# Altium PCB Current Printed PCB, Altium.pcbdoc
Units mil, origin at the board's own origin, x right, y up, seen from the top; angles counter-clockwise.
Board outline 3332.84 x 3303.97 mil, 2 copper layers (Top Layer, Bottom Layer); 17 components, 43 nets, 85 pads, 8 vias.
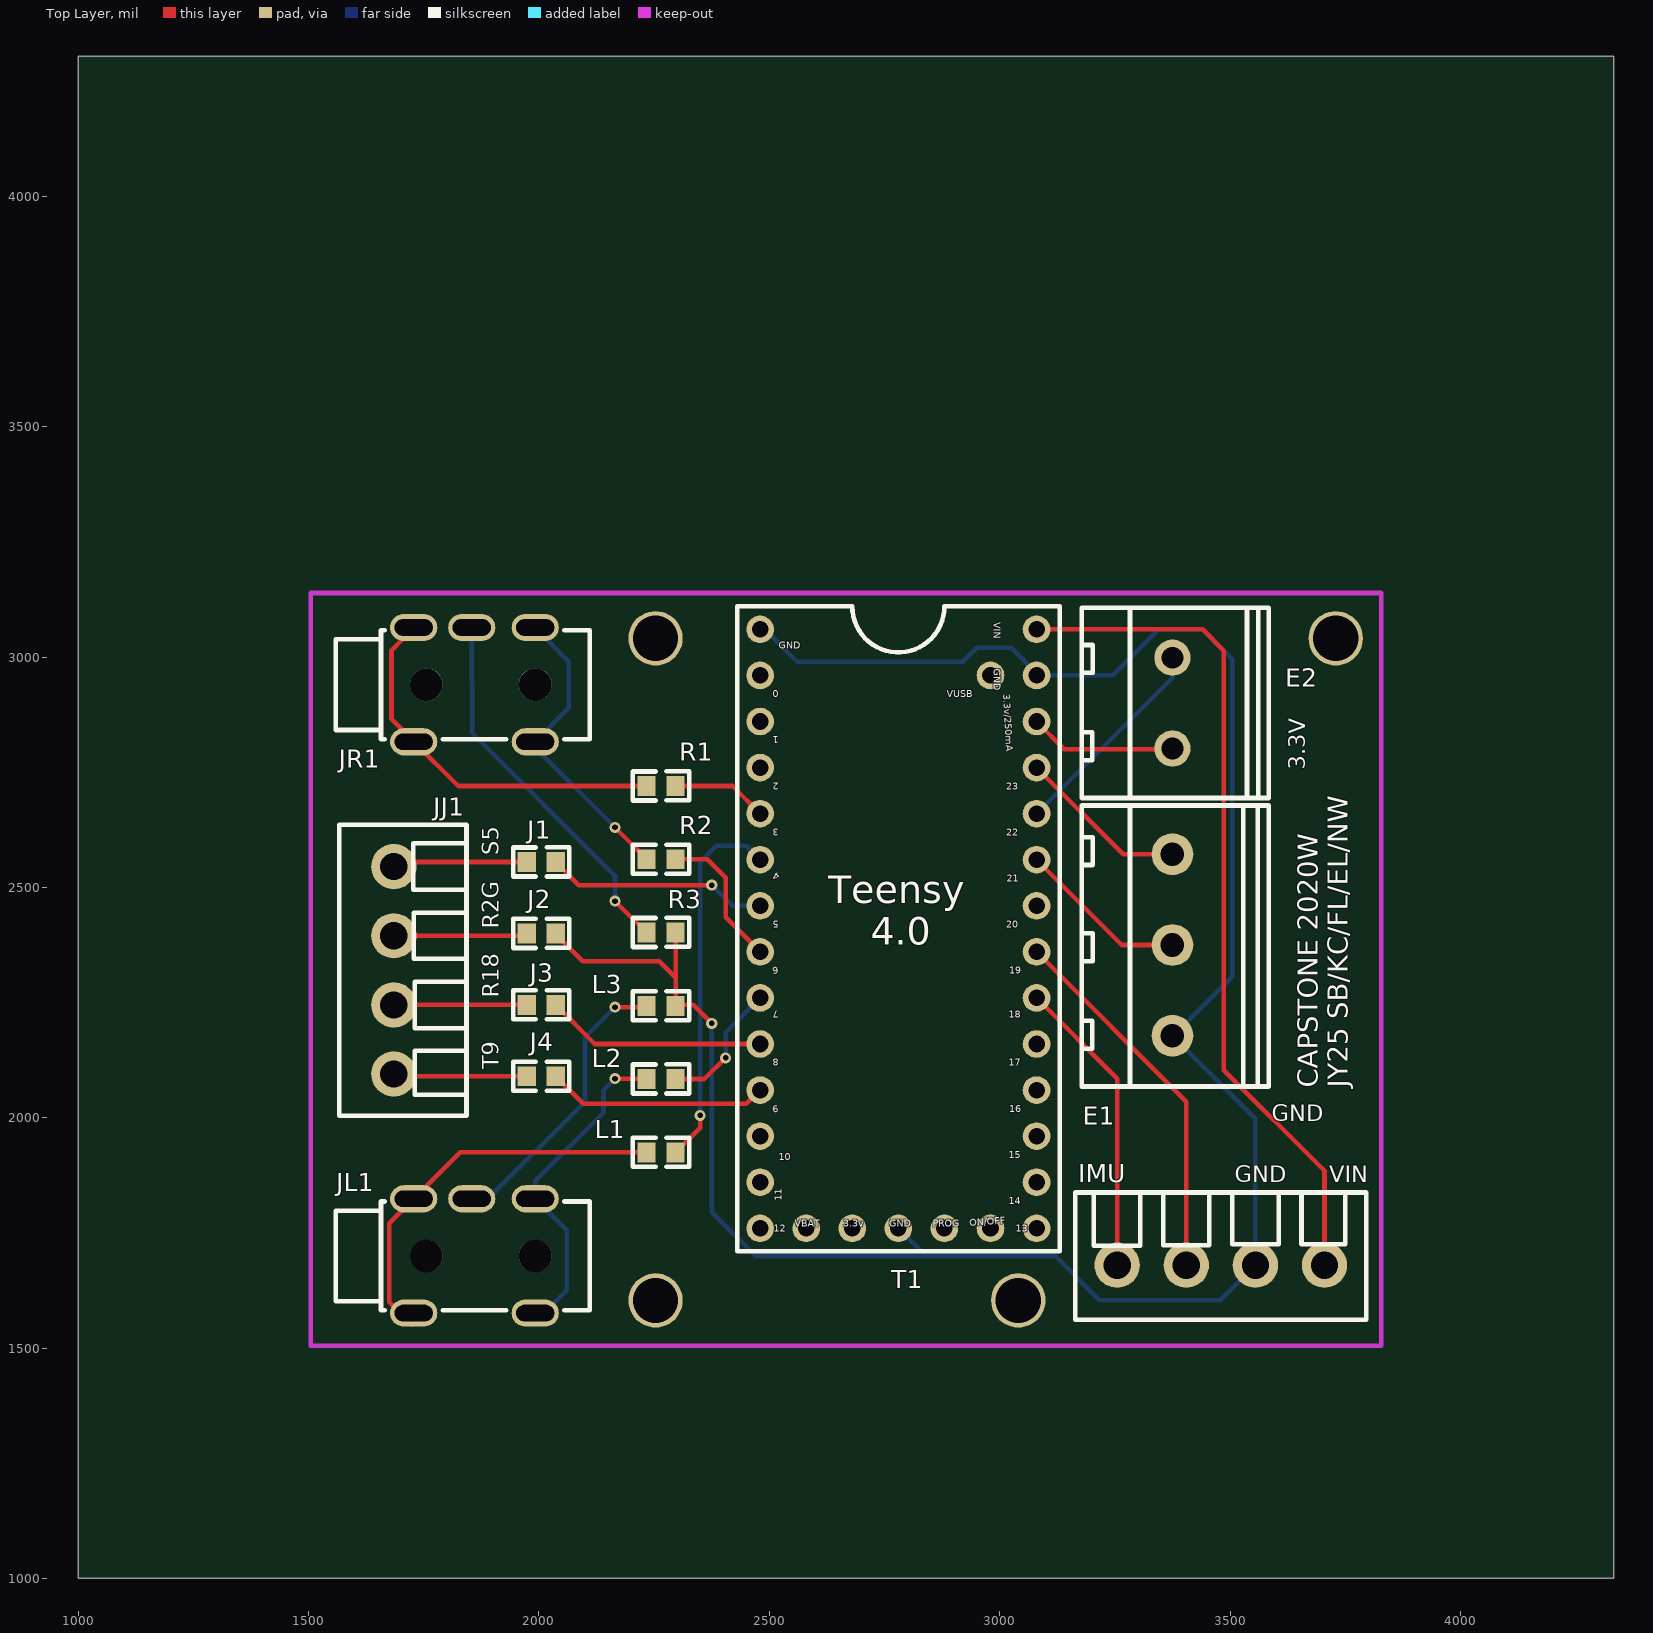
[diagram p0: Top Layer view]
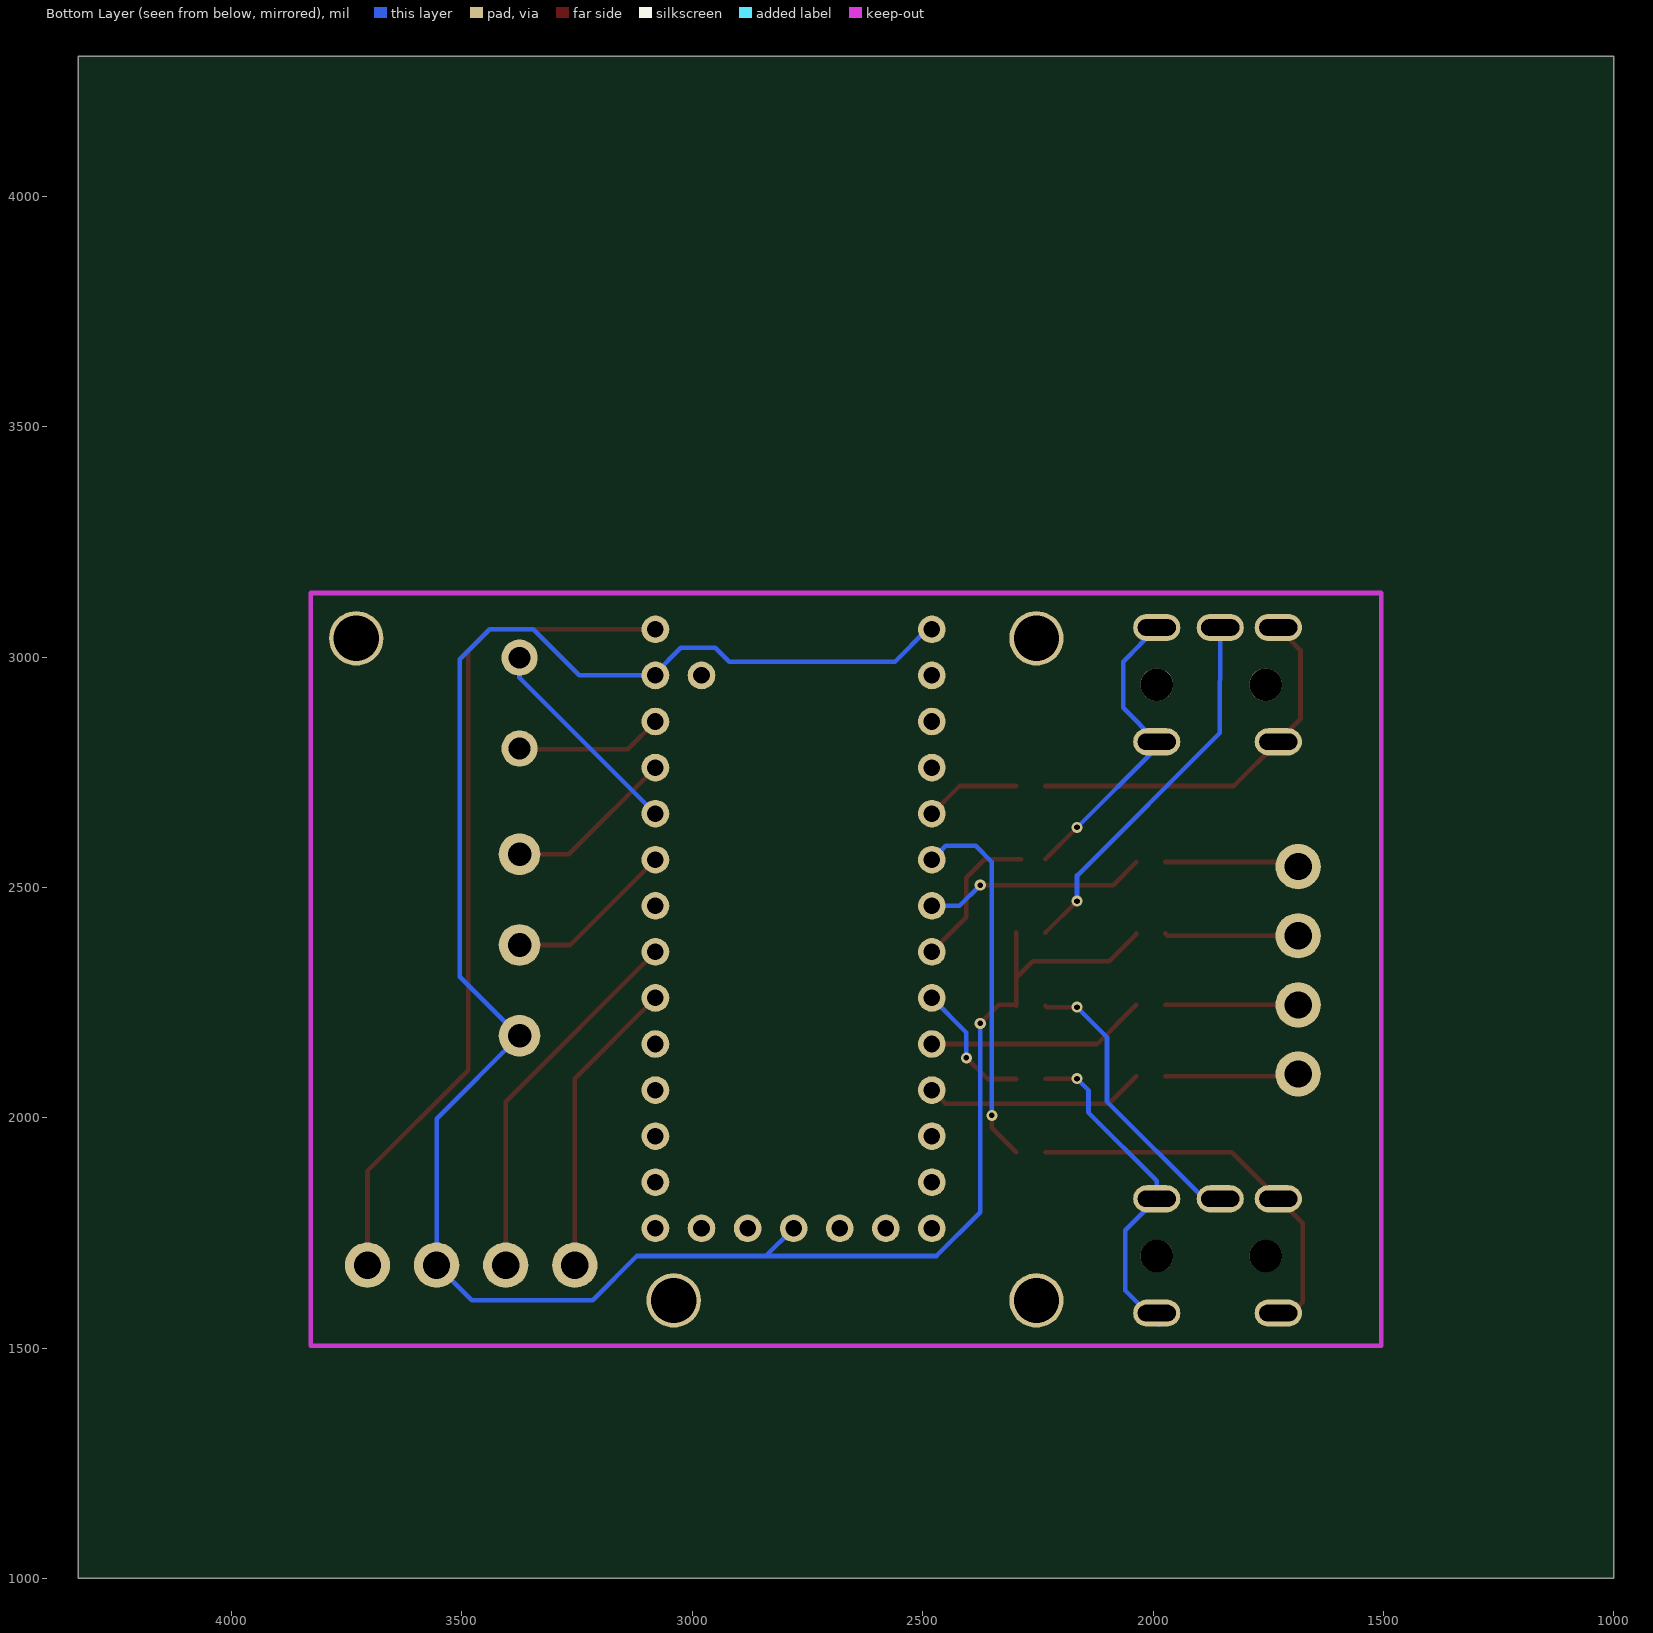
[diagram p1: Bottom Layer view, seen from below]

## Layer stack, top to bottom
Top Solder: solder mask 0.4, Solder Resist, Dk 3.5
Top Layer: signal copper 1.4
Dielectric1: dielectric 12.6, FR-4, Dk 4.8
Bottom Layer: signal copper 1.4
Bottom Solder: solder mask 0.4, Solder Resist, Dk 3.5

## Board outline
4332.84,1000 1000,1000 1000,4303.97 4332.84,4303.97

## Design rules (kind name [scope] priority, off if disabled: settings)
Clearance [All] p1: gap=10 ignorepadtopadclearanceinfootprint=FALSE except(0: Arc-Hole Track-Hole SMDPad-Hole THPad-Hole Via-Hole Fill-Hole Poly-Hole Region-Hole Text-Hole)
PolygonConnect [All] p1: connectstyle=Relief reliefconductorwidth=10 reliefentries=4 polygonreliefangle="90 Angle" airgapwidth=10
RoutingVias [All] p1: holewidth=28 width=50 viastyle="Through Hole" minholewidth=28 minwidth=50 maxholewidth=28 maxwidth=50
SolderMaskExpansion [All] p1: expansion=4
Width [All] p1: maxlimit=10 minlimit=10 preferedwidth=10
30 further rules are at their usual default settings.

## Components (designator, comment, footprint, x,y, rotation, side; value= is the part's Value field where it differs from the comment)
E1 "WJ128V-5.0-3P" CONN-TH_3P-P5.00_WJ128V-5.0-3P 3375,2375 r90 top
E2 "WJ128V-5.0-2P" CONN-TH_2P-P5.00_WJ128V-5.0-2P 3375,2900 r90 top
IMU "DB125-3.81-4P" CONN-TH_DB125-3.81-4P 3480,1680 r180 top
J1 "1K" R0603 2005,2555 r0 top
J2 "1K" R0603 2005,2400 r0 top
J3 "10K" R0603 2005,2245 r0 top
J4 "10K" R0603 2005,2090 r0 top
JJ1 "DB125-3.81-4P" CONN-TH_DB125-3.81-4P 1685,2320 r90 top
JL1 "PJ313D" AUDIO-TH_PJ313D 1860,1700 r0 top
JR1 "PJ313D" AUDIO-TH_PJ313D 1860,2940 r0 top
L1 "1K" R0603 2265,1925 r0 top
L2 "10K" R0603 2265,2084 r0 top
L3 "1K" R0603 2265,2243 r0 top
R1 "1K" R0603 2265,2720 r0 top
R2 "10K" R0603 2265,2561 r0 top
R3 "1K" R0603 2265,2402 r0 top
T1 "TEENSY 4.0 W/O int Pins" "TEENSY 4.0 W/O INT PINS" 2780,2410 r0 top

## Footprints (in the part's own frame and the unit in brackets; to place one, negate y for a bottom-side part, rotate by r counter-clockwise, add the part's x,y. Pads: shape width x height; smd on the part's side, far side on the other; paste and mask are expansions set on the pad)
AUDIO-TH_PJ313D [mm]
  oval 2.6x1.5 hole 0.9 slot 2.1 at 0 deg: 2(-3.35,-3.15) 2(-3.35,3.15) 3(-0.15,3.15) 4(3.35,-3.15) 4(3.35,3.15)
  round 1.8 hole 1.8 unplated: ""(-2.65,0) ""(3.35,0)
  silkscreen extent -7.65,-3 6.35,3
CONN-TH_2P-P5.00_WJ128V-5.0-2P [mm]
  round 2 hole 1.2: 1(-2.504,0) 2(2.504,0)
  silkscreen extent -5.23,-5.3 5.27,5
CONN-TH_3P-P5.00_WJ128V-5.0-3P [mm]
  round 2.3 hole 1.3: 1(-5,0) 2(-0.001,0) 3(5,0)
  silkscreen extent -7.81,-5.31 7.71,5.01
CONN-TH_DB125-3.81-4P [mm]
  round 2.5 hole 1.5: 1(-5.715,0) 2(-1.905,0) 3(1.905,0) 4(5.715,0)
  silkscreen extent -8.03,-4.01 8.03,3
R0603 [mm]
  rect 1x1.1 smd: 1(-0.8,0) 2(0.8,0)
  silkscreen extent -1.55,-0.8 1.55,0.81
"TEENSY 4.0 W/O INT PINS" [mil]
  round 60 hole 36: 0(-300,550) 1(-300,450) 2(-300,350) 3(-300,250) 3.3V(-100,-650) 3.3V(300,450) 4(-300,150) 5(-300,50) 6(-300,-50) 7(-300,-150) 8(-300,-250) 9(-300,-350) 10(-300,-450) 11(-300,-550) 12(-300,-650) 13(300,-650) 14(300,-550) 15(300,-450) 16(300,-350) 17(300,-250) 18(300,-150) 19(300,-50) 20(300,50) 21(300,150) 22(300,250) 23(300,350) GND(-300,650) GND(0,-650) GND(300,550) ONOFF(200,-650) PROGRAM(100,-650) VBAT(-200,-650) VIN(300,650) VUSB(200,550)
  silkscreen extent -350,-700 350,700

## Free pads (board coordinates)
  round 118.11 hole 98.43: 1(2253.03,1603.43) 1(2253.03,3040.44) 1(3729.41,3040.44) 2(3040.43,1603.42)

## Via types
v1: diameter 24, hole 12, Top Layer to Bottom Layer, 8 vias

## Nets (pads, with @x,y where several pads share a name; then routed paths per layer and width w, separated by ;. In a path a pad name is that pad's centre, name@x,y a point inside that pad or via, vN(x,y) a via of type N, cw(c..) or ccw(c..) an arc to the next point about the centre after c; other vN are vias at no path point)
GND: E1.1 IMU.2 J2.2 L3.2 R3.2 T1.GND | length 4948.1
  Top Layer w10: J2.2 2036.5,2398.5 2095,2340 2260.77,2340 2296.49,2304.28 ; R3.2 L3.2 2298.49,2245 2335,2245 v1(2375,2205)
  Bottom Layer w10: v1(2375,2205) 2375,1795 2470,1700 2850,1700 ; T1.GND@2490,3060 2560,2990 2920,2990 2950,3020 3025,3020 3080,2965 3080,2960 3245,2960 3345,3060 3440,3060 3505,2995 3505,2306.42 3376.73,2178.15 3375,2178.15 3555,1998.15 IMU.2 3478.32,1603.58 3216.42,1603.58 3120,1700 2840,1700 T1.GND@2780,1760
HOLE: pad.1 pad.2
IMU_1: IMU.1 T1.VIN | length 1850
  Top Layer w10: T1.VIN 3440.4,3060 3486.6,3013.8 3486.6,2103.4 3705,1885 IMU.1
IMU_3: IMU.3 T1.19 | length 814.6
  Top Layer w10: T1.19 3405,2035 IMU.3
IMU_4: IMU.4 T1.18 | length 652.5
  Top Layer w10: T1.18 3255,2085 IMU.4
J3_2: J3.2 T1.8 | length 478.7
  Top Layer w10: J3.2 2121.49,2160 T1.8
J4_2: J4.2 T1.9 | length 480.8
  Top Layer w10: J4.2 2096.49,2030 2450,2030 T1.9
JJ_1: J4.1 JJ1.1 | length 290.6
  Top Layer w10: JJ1.1 1690,2090 J4.1
JJ_2: J3.1 JJ1.2 | length 288.5
  Top Layer w10: JJ1.2 J3.1
JJ_3: J2.1 JJ1.3 | length 290.6
  Top Layer w10: JJ1.3 1968.5,2395 J2.1
JJ_4: J1.1 JJ1.4 | length 292.6
  Top Layer w10: JJ1.4 1695,2555 J1.1
JL_2: JL1.2 L1.1 | length 861.9
  Top Layer w10: JL1.2@1723.11,1550.98 1675,1600 1675,1770.91 1728.11,1824.02 1829.09,1925 L1.1
JR_3: JR1.3 R3.1 | length 819.9
  Top Layer w10: v1(2165,2470) R3.1
  Bottom Layer w10: JR1.3 1854.89,2835.06 2163.42,2526.54 2165,2526.54 v1(2165,2470)
L2_1: JL1.4 L2.1 | length 732.5
  Top Layer w10: v1(2165,2085) L2.1@2233.51,2085
  Bottom Layer w10: JL1.4@1986.89,1550.98 2060,1625 2060,1755.9 1991.89,1824.01 1991.9,1863.1 2140,2011.2 2140,2060 v1(2165,2085)
L2_2: L2.2 T1.7 | length 288.6
  Top Layer w10: L2.2 2359,2084 v1(2405,2130)
  Bottom Layer w10: v1(2405,2130) 2405,2185 T1.7
L3_1: JL1.3 L3.1 | length 635
  Top Layer w10: v1(2165,2240) 2230.51,2240 L3.1
  Bottom Layer w10: JL1.3 1889.02,1824.02 2100,2035 2100,2175 v1(2165,2240)
R1_1: JR1.2 R1.1 | length 832.2
  Top Layer w10: JR1.2@1728.1,3064 1680,3015 1680,2865 1728.1,2816 1825,2720 R1.1
R1_2: R1.2 T1.3 | length 208.4
  Top Layer w10: R1.2 2420,2720 T1.3
R2_1: JR1.4 R2.1 | length 663
  Top Layer w10: v1(2165,2630) R2.1
  Bottom Layer w10: JR1.4@1991.9,3064 2065,2990 2065,2890 1991.9,2816 1991.89,2803.11 v1(2165,2630)
R2_2: R2.2 T1.6 | length 326.9
  Top Layer w10: R2.2@2286.5,2560.8 2365,2560.8 2405,2520.8 2405,2435 T1.6
T_0: T1.0
T_1: T1.1
T_2: T1.2
T_3.3V: T1.3.3V@2680,1760
T_3.3V/250MA: E2.1 T1.3.3V@3080,2860 | length 320.4
  Top Layer w10: T1.3.3V@3080,2860 3140,2800 3373.6,2800 E2.1
T_4: L1.2 T1.4 | length 809.1
  Top Layer w10: L1.2 2350,1978.51 v1(2350,2005)
  Bottom Layer w10: v1(2350,2005) 2350,2555 2385,2590 2450,2590 T1.4
T_5: J1.2 T1.5 | length 482.9
  Top Layer w10: J1.2 2086.49,2505 v1(2375,2505)
  Bottom Layer w10: v1(2375,2505) 2420,2460 T1.5
T_10: T1.10
T_11: T1.11
T_12: T1.12
T_13: T1.13
T_14: T1.14
T_15: T1.15
T_16: T1.16
T_17: T1.17
T_20: T1.20
T_21: E1.2 T1.21 | length 371.7
  Top Layer w10: T1.21 3265.05,2374.95 E1.2
T_22: E2.2 T1.22 | length 460.8
  Bottom Layer w10: T1.22 3375,2955 E2.2
T_23: E1.3 T1.23 | length 372.9
  Top Layer w10: T1.23 3268.15,2571.85 E1.3
T_ONOFF: T1.ONOFF
T_PROGRAM: T1.PROGRAM
T_VBAT: T1.VBAT
T_VUSB: T1.VUSB
pads on no net: JL1. JR1.

## Silkscreen, mask and mechanical layers (free items; w line width, h text height)
Top Overlay:
  text "3.3V" at 3662.72,2755 h35.43 r90
  text "S5" at 1912.72,2570 h35.43 r90
  text "R2G" at 1912.72,2410 h35.43 r90
  text "R18" at 1912.72,2260 h35.43 r90
  text "T9" at 1912.72,2105 h35.43 r90
  text "CAPSTONE 2020W                                             / JY25 SB/KC/FL/EL/NW" at 3755,2065 h43.31 r90
  text "GND" at 3590,1992.28 h35.43
  text "GND" at 3510,1860 h35.43
  text "VIN" at 3715,1860 h35.43

## Text inside footprints (layer, text, board x,y; h text height)
T1: Top Overlay "Teensy" at 2627.91,2465.07 h60; Top Overlay "4.0" at 2720,2375.31 h60; Top Overlay "VBAT" at 2555,1763.55 h15; Top Overlay "3.3v" at 2660,1763.55 h15; Top Overlay "GND" at 2760,1763.55 h15; Top Overlay "PROG" at 2855,1763.55 h15; Top Overlay "ON/OFF" at 2935.52,1764.63 h15 r4; Top Overlay "GND" at 2520,3017.5 h15; Top Overlay "0" at 2520,2927.5 h15 r180; Top Overlay "1" at 2520,2827.5 h15 r180; Top Overlay "2" at 2520,2727.5 h15 r180; Top Overlay "3" at 2520,2627.5 h15 r180; Top Overlay "4" at 2524.3,2526.14 h15 r145; Top Overlay "5" at 2520,2427.5 h15 r180; Top Overlay "6" at 2519.35,2327.47 h15 r185; Top Overlay "7" at 2520,2232.5 h15 r180; Top Overlay "8" at 2520,2127.5 h15 r180; Top Overlay "9" at 2519.35,2027.47 h15 r185; Top Overlay "10" at 2520,1907.5 h15; Top Overlay "11" at 2527.5,1820 h15 r90; Top Overlay "12" at 2510,1752.3 h15; Top Overlay "VIN" at 2987.5,3075 h15 r270; Top Overlay "GND" at 2987.5,2975 h15 r270; Top Overlay "3.3v/250mA" at 3007.51,2919.61 h15 r273; Top Overlay "23" at 3013.91,2712.3 h15; Top Overlay "22" at 3013.91,2612.5 h15; Top Overlay "21" at 3015,2512.5 h15; Top Overlay "20" at 3013.91,2412.5 h15; Top Overlay "19" at 3020.7,2312.3 h15; Top Overlay "18" at 3020,2217.3 h15; Top Overlay "17" at 3020,2112.3 h15; Top Overlay "16" at 3020.7,2012.3 h15; Top Overlay "15" at 3020,1912.3 h15; Top Overlay "14" at 3019.41,1812.3 h15; Top Overlay "VUSB" at 2885,2912.5 h15; Top Overlay "13" at 3035,1752.3 h15